# EAGLE board CT_schematic (EAGLE 7.6.0)

Size 100 x 80 mm. Coordinates in mm from the lower left corner, seen from the top.
Outline: 0,0 100,0 100,80 0,80 0,0
Copper layers (1*16): Top 0.035mm / dielectric 1.5mm / Bottom 0.035mm
Design rules "default": minimum track width 10mil, minimum drill 24mil, track to track 8mil, track to pad 8mil, pad to pad 8mil, via to via 8mil, smd to smd 8mil, copper to edge 40mil, drill to drill 8mil, minimum pad ring 10mil, minimum via ring 8mil, stop-mask expansion 4mil, vias tented up to drill 0mil, thermal gap 10mil

## Footprints (pad centres in the part's own frame; a part is rotated, then mirrored left to right if it is on the bottom)
C0603 = smd 0.8 x 0.8: 1 -0.762,0; 2 0.762,0
C0402 = smd 0.5 x 0.5: 1 -0.508,0; 2 0.508,0
C1210 = smd 1.2 x 2.5: 1 -1.524,0; 2 1.524,0
EXV-9H = smd 3.505 x 1.676: 1 -2.857,0; 2 2.857,0
L0603 = smd 0.8 x 0.8: 1 -0.762,0; 2 0.762,0
PJ-037B_PACKAGE = drill 3.7 square: 1 12,0 | drill 3.2 square: 2 6,0
R0603 = smd 0.8 x 0.8: 1 -0.762,0; 2 0.762,0
LQFP64 = smd 0.3 x 1.2: 1 -3.75,-5.75; 2 -3.25,-5.75; 3 -2.75,-5.75; 4 -2.25,-5.75; 5 -1.75,-5.75; 6 -1.25,-5.75; 7 -0.75,-5.75; 8 -0.25,-5.75; 9 0.25,-5.75; 10 0.75,-5.75; 11 1.25,-5.75; 12 1.75,-5.75; 13 2.25,-5.75; 14 2.75,-5.75; 15 3.25,-5.75; 16 3.75,-5.75; 33 3.75,5.75; 34 3.25,5.75; 35 2.75,5.75; 36 2.25,5.75; 37 1.75,5.75; 38 1.25,5.75; 39 0.75,5.75; 40 0.25,5.75; 41 -0.25,5.75; 42 -0.75,5.75; 43 -1.25,5.75; 44 -1.75,5.75; 45 -2.25,5.75; 46 -2.75,5.75; 47 -3.25,5.75; 48 -3.75,5.75 | smd 1.2 x 0.3: 17 5.75,-3.75; 18 5.75,-3.25; 19 5.75,-2.75; 20 5.75,-2.25; 21 5.75,-1.75; 22 5.75,-1.25; 23 5.75,-0.75; 24 5.75,-0.25; 25 5.75,0.25; 26 5.75,0.75; 27 5.75,1.25; 28 5.75,1.75; 29 5.75,2.25; 30 5.75,2.75; 31 5.75,3.25; 32 5.75,3.75; 49 -5.75,3.75; 50 -5.75,3.25; 51 -5.75,2.75; 52 -5.75,2.25; 53 -5.75,1.75; 54 -5.75,1.25; 55 -5.75,0.75; 56 -5.75,0.25; 57 -5.75,-0.25; 58 -5.75,-0.75; 59 -5.75,-1.25; 60 -5.75,-1.75; 61 -5.75,-2.25; 62 -5.75,-2.75; 63 -5.75,-3.25; 64 -5.75,-3.75
SOIC-8 = smd 1.6 x 0.6: 1 -2.7,1.905 | smd 1.55 x 0.6: 2 -2.7,0.635; 3 -2.7,-0.635; 4 -2.7,-1.905; 5 2.7,-1.905; 6 2.7,-0.635; 7 2.7,0.635; 8 2.7,1.905
USB-A-H = drill 0.914: 1 2.718,3.493; 2 2.718,1.003; 3 2.718,-1.003; 4 2.718,-3.493 | drill 2.311: 5 0,-6.566; 6 0,6.566
SOT143B = smd 1 x 0.7: 1 -0.75,-1 | smd 0.6 x 0.7: 2 0.95,-1; 3 0.95,1; 4 -0.95,1
ABLS-25.000MHZ-B2F-T = smd 5.6 x 2.8: 1 -3.81,0; 2 5.69,0
ASEK = smd 1.4 x 1: 1 -1.1,-0.8; 2 1.1,-0.8; 3 1.1,0.8; 4 -1.1,0.8
SOIC-8_EP = smd 1.6 x 0.533: 1 -2.921,1.905; 2 -2.921,0.635; 3 -2.921,-0.635; 4 -2.921,-1.905; 5 2.921,-1.905; 6 2.921,-0.635; 7 2.921,0.635; 8 2.921,1.905 | smd 2.54 x 3.302: EPAD 0,0 | drill 0.406 pad 0.406: P$1 -0.508,0.635; P$2 0.381,0.635; P$3 -0.508,-0.635; P$4 0.381,-0.635
SON-6 = smd 0.55 x 0.3: 1 -0.355,0.5 | smd 0.52 x 0.3: 2 -0.37,0; 3 -0.37,-0.5; 4 0.37,-0.5; 5 0.37,0; 6 0.37,0.5
SW_4-1437565-2 = smd 1.4 x 2.1: 1 -2.23,4.55; 2 -2.23,-4.55; 3 2.23,4.55; 4 2.23,-4.55
LGM67K-G1J2-24-Z = smd 0.8 x 1.4: A -2,0; C 0,0
NC7SZ125M5X = smd 1.3 x 0.7: 1 -1.3,0.95; 2 -1.3,0; 3 -1.3,-0.95; 4 1.3,-0.95; 5 1.3,0.95

## Placement (x,y rotation side)
C1  1e-07  [C0603]  -33.02,54.61 0 top  (outside the outline)
C2  1e-07  [C0603]  -36.83,54.61 0 top  (outside the outline)
C3  1e-07  [C0603]  -40.64,54.61 0 top  (outside the outline)
C4  1e-07  [C0603]  -44.45,54.61 0 top  (outside the outline)
C5  4.7e-06  [C0603]  -29.21,54.61 0 top  (outside the outline)
C6  1e-08  [C0603]  -48.26,54.61 0 top  (outside the outline)
C7  1e-06  [C0603]  -52.07,54.61 0 top  (outside the outline)
C8  1e-07  [C0603]  -55.88,54.61 0 top  (outside the outline)
C9  1e-11  [C0402]  -38.1,59.69 0 top  (outside the outline)
C10  1e-11  [C0402]  -41.91,59.69 0 top  (outside the outline)
C11  1e-08  [C0402]  -45.72,59.69 0 top  (outside the outline)
C12  1e-08  [C0402]  -49.53,59.69 0 top  (outside the outline)
C13  1e-05  [C1210]  -58.42,41.91 0 top  (outside the outline)
C14  1e-05  [C1210]  -16.51,48.26 0 top  (outside the outline)
C15  1e-05  [C1210]  -22.86,48.26 0 top  (outside the outline)
C16  1e-05  [C1210]  -29.21,48.26 0 top  (outside the outline)
C17  1e-07  [C0402]  -53.34,59.69 0 top  (outside the outline)
C18  0.0001  [EXV-9H]  -38.1,34.29 0 top  (outside the outline)
C19  0.0001  [EXV-9H]  -49.53,34.29 0 top  (outside the outline)
C20  1e-08  [C0402]  -57.15,59.69 0 top  (outside the outline)
F1  240.0  [L0603]  -59.69,54.61 0 top  (outside the outline)
J1  PJ-037B  [PJ-037B_PACKAGE]  -44.45,7.62 0 top  (outside the outline)
R2  1000.0  [R0603]  -15.24,59.69 0 top  (outside the outline)
R4  4700.0  [R0603]  -19.05,59.69 0 top  (outside the outline)
R5  2200.0  [R0603]  -22.86,59.69 0 top  (outside the outline)
R6  2200.0  [R0603]  -26.67,59.69 0 top  (outside the outline)
R7  10000.0  [R0603]  -59.69,48.26 0 top  (outside the outline)
R8  10000.0  [R0603]  -15.24,54.61 0 top  (outside the outline)
R9  4031.5447154472  [R0603]  -44.45,48.26 0 top  (outside the outline)
R10  2200.0  [R0603]  -30.48,59.69 0 top  (outside the outline)
R11  10000.0  [R0603]  -20.32,54.61 0 top  (outside the outline)
R12  10000.0  [R0603]  -25.4,54.61 0 top  (outside the outline)
R13  9100.0  [R0603]  -34.29,59.69 0 top  (outside the outline)
R14  680000.0  [R0603]  -49.53,48.26 0 top  (outside the outline)
R15  120000.0  [R0603]  -54.61,48.26 0 top  (outside the outline)
U1  STM32L052R8T6  [LQFP64]  -57.15,7.62 0 top  (outside the outline)
U2  M24M02-DRMN6TP  [SOIC-8]  -44.45,22.86 0 top  (outside the outline)
U3  61400416021  [USB-A-H]  -19.05,8.89 0 top  (outside the outline)
U4  prtr5v0u2ax  [SOT143B]  -24.13,64.77 0 top  (outside the outline)
U5  ABLS-25.000MHZ-B2F-T  [ABLS-25.000MHZ-B2F-T]  -26.67,41.91 0 top  (outside the outline)
U6  ASEK-32.768KHz-ECST  [ASEK]  -29.21,34.29 0 top  (outside the outline)
U7  MIC5234YME  [SOIC-8_EP]  -38.1,40.64 0 top  (outside the outline)
U8  TPS3895ADRYR  [SON-6]  -27.94,63.5 0 top  (outside the outline)
U9  4-1437565-2  [SW_4-1437565-2]  -27.94,24.13 0 top  (outside the outline)
U10  Q65110A2395  [LGM67K-G1J2-24-Z]  -46.99,41.91 0 top  (outside the outline)
U11  nc7sz125m5x  [NC7SZ125M5X]  -34.29,48.26 0 top  (outside the outline)

## Library data of the parts
C1-C20 F1 J1 R2 R4-R15 U1-U11 = circuit_tree

## Nets
CLK_CRYSTAL_U1_5: C9.1 U1.5 U5.1
CLK_CRYSTAL_U1_6: C10.1 U1.6 U5.2
CLK_U1_3: U1.3 U6.3
GND: C1.2 C2.2 C3.2 C4.2 C5.2 C6.2 C7.2 C8.2 C9.2 C10.2 C11.2 C12.2 C13.2 C14.2 C15.2 C16.2 C17.2 C18.2 C19.2 C20.2 J1.2 R2.2 R7.2 R8.2 R10.2 R13.2 R15.2 U1.12 U1.18 U1.31 U1.47 U1.63 U2.4 U3.4 U3.5 U3.6 U4.1 U6.2 U7.7 U7.EPAD U8.2 U10.C U11.1 U11.3
NET_U1_7: R4.1 U1.7 U11.4
NET_U1_13: C6.1 C7.1 F1.1 U1.13
NET_U1_58: R5.1 U1.58 U2.6
NET_U1_59: R6.1 U1.59 U2.5
NET_U1_60: R7.1 U1.60
NET_U1_61: U10.A
NET_U1_62: U9.3 U9.4
NET_U2_3: R8.1 U2.3
NET_U4_4: U3.1 U4.4
NET_U7_4: R9.2 R10.1 U7.4
NET_U8_1: R12.1 R13.1 U8.1
NET_U8_3: R14.2 R15.1 U8.3
NET_U8_4: R11.1 U8.4 U11.2
NET_U9_1: R2.1 U9.1 U9.2
PROC_USB_DM: U1.44 U3.2 U4.3
PROC_USB_DP: U1.45 U3.3 U4.2
VCC_S1_5V3: C13.1 C14.1 C18.1 C19.1 J1.1 U7.5 U7.8
VCC_TIER1_3V3: C1.1 C2.1 C3.1 C4.1 C5.1 C8.1 C11.1 C12.1 C15.1 C16.1 C17.1 C20.1 F1.2 R4.2 R5.2 R6.2 R9.1 R11.2 R12.2 R14.1 U1.1 U1.19 U1.32 U1.48 U1.64 U2.8 U6.4 U7.1 U8.6 U11.5

## Tracks (layer width: path | path; a pad name or v marks a point on that pad's centre or on a via)
CLK_CRYSTAL_U1_5  (2 unrouted)
CLK_CRYSTAL_U1_6  (2 unrouted)
CLK_U1_3  (1 unrouted)
GND  (43 unrouted)
NET_U1_7  (2 unrouted)
NET_U1_13  (3 unrouted)
NET_U1_58  (2 unrouted)
NET_U1_59  (2 unrouted)
NET_U1_60  (1 unrouted)
NET_U1_62  (1 unrouted)
NET_U2_3  (1 unrouted)
NET_U4_4  (1 unrouted)
NET_U7_4  (2 unrouted)
NET_U8_1  (2 unrouted)
NET_U8_3  (2 unrouted)
NET_U8_4  (2 unrouted)
NET_U9_1  (2 unrouted)
PROC_USB_DM  (2 unrouted)
PROC_USB_DP  (2 unrouted)
VCC_S1_5V3  (6 unrouted)
VCC_TIER1_3V3  (29 unrouted)